# Altium PCB Educational electronics module.PcbDoc
Units mm, origin at the board's own origin, x right, y up, seen from the top; angles counter-clockwise.
Board outline 45 x 40 mm, 2 copper layers (Top Layer, Bottom Layer), stack 0.36 mm thick; 11 components, 10 nets, 39 pads, 0 vias.
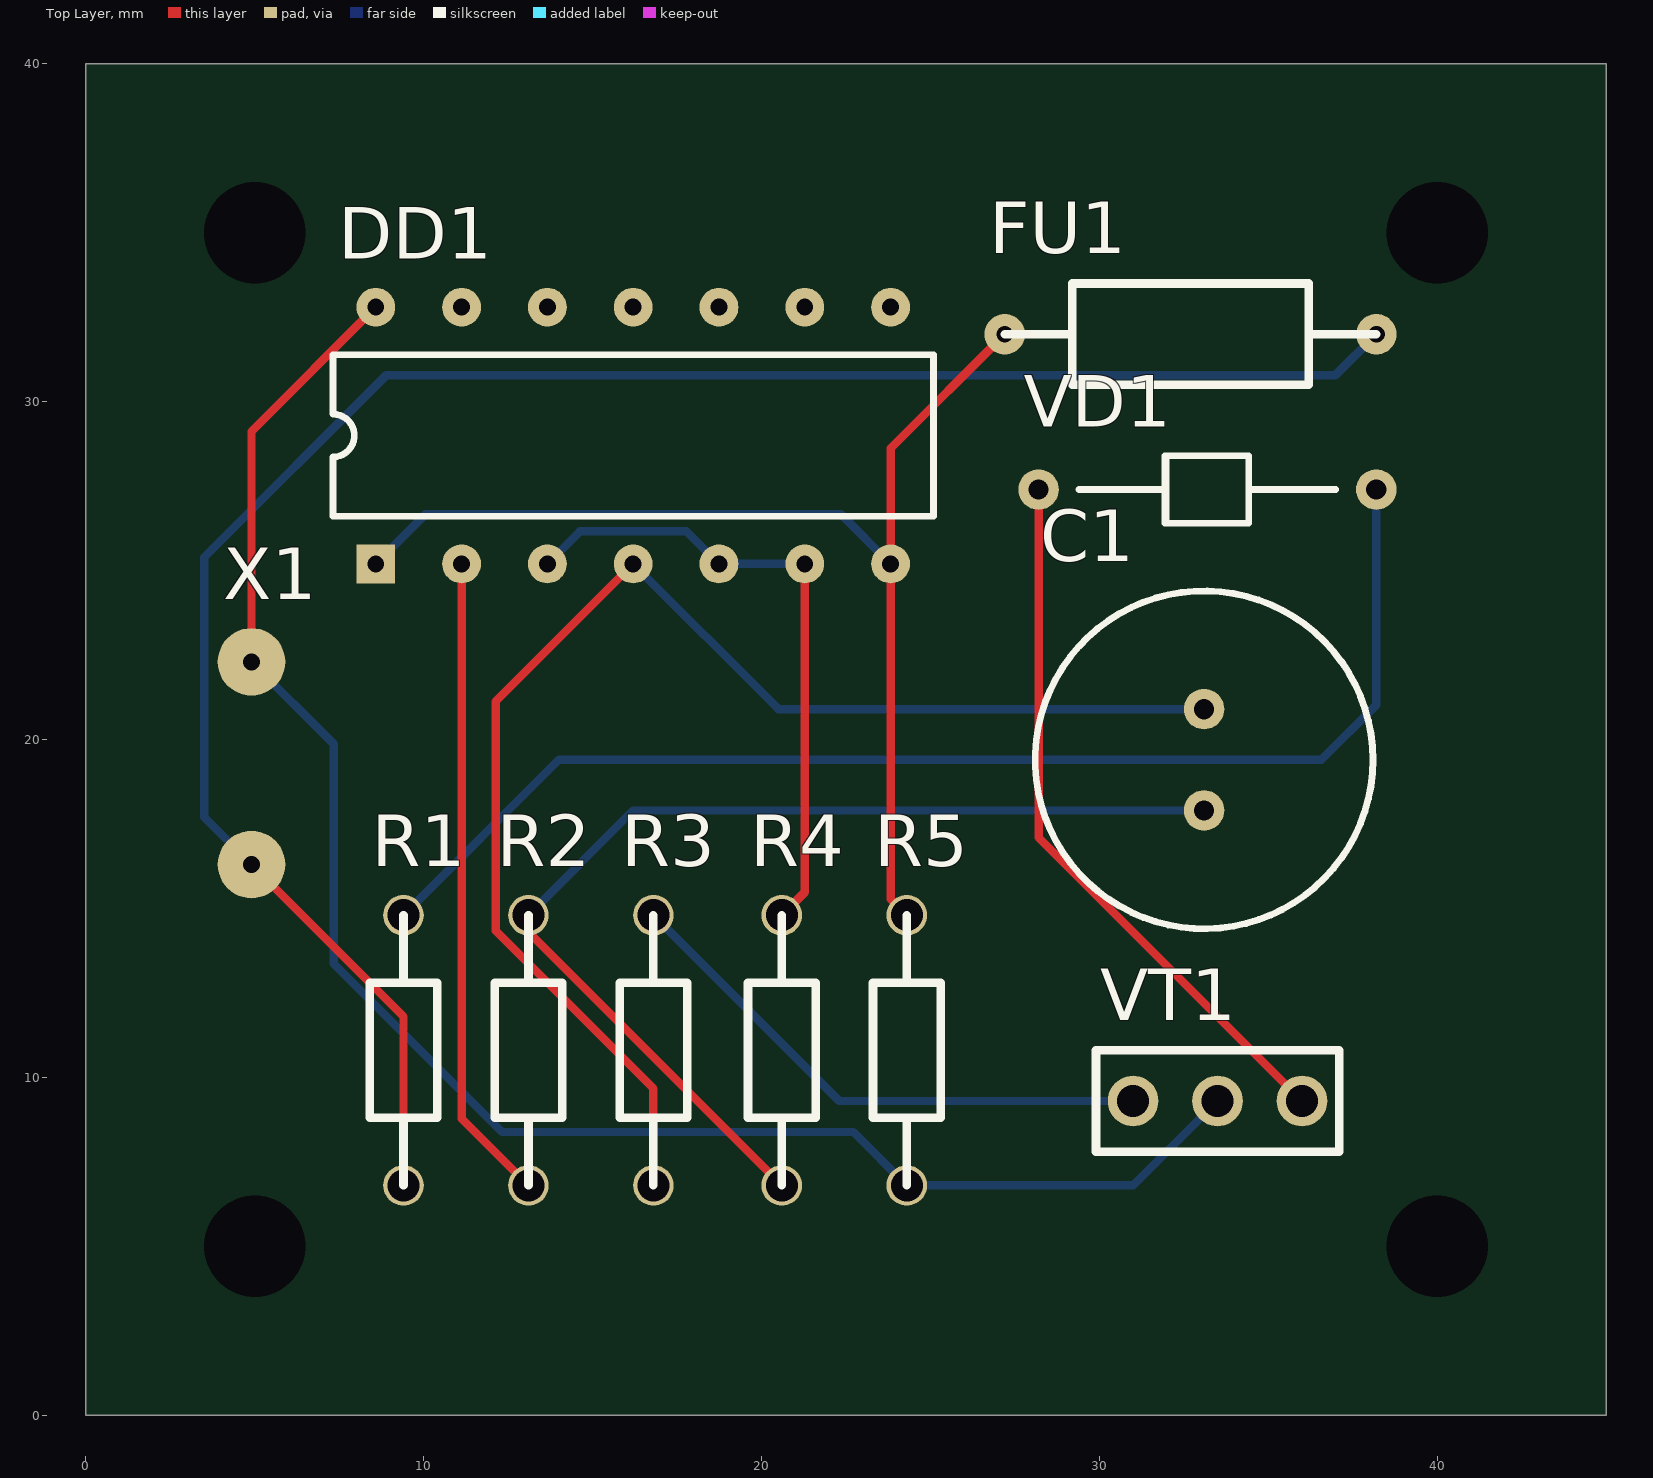
[diagram p0: Top Layer view]
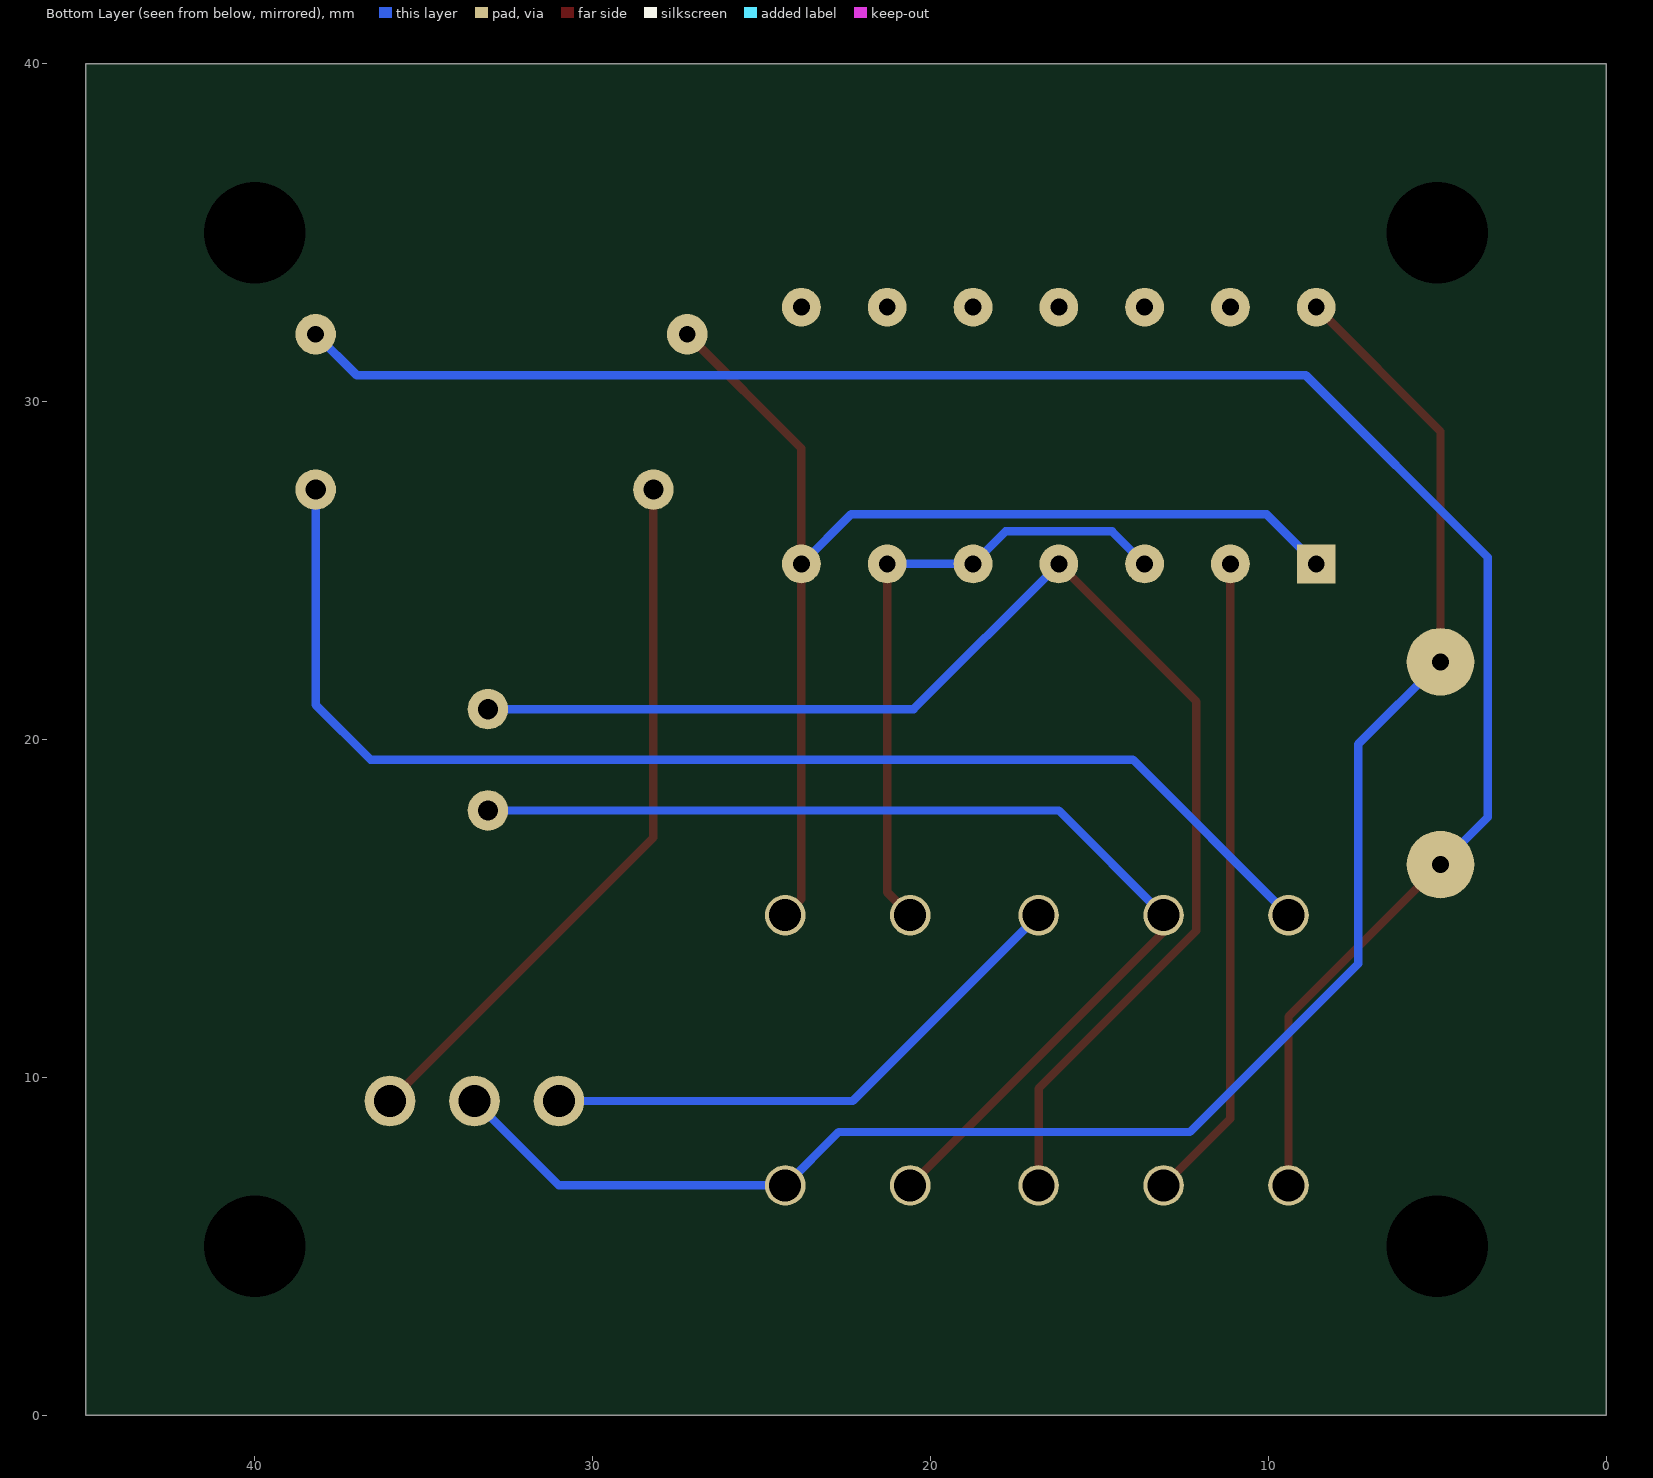
[diagram p1: Bottom Layer view, seen from below]

## Layer stack, top to bottom
Top Solder: solder mask 0.01, Solder Resist, Dk 3.5
Top Layer: signal copper 0.03
Dielectric 1: dielectric 0.3, FR-4, Dk 4.8
Bottom Layer: signal copper 0.03
Bottom Solder: solder mask 0.01, Solder Resist, Dk 3.5

## Board outline
0,0 45,0 45,40 0,40

## Design rules (kind name [scope] priority, off if disabled: settings)
Clearance [All] p1: gap=0.25 ignorepadtopadclearanceinfootprint=FALSE
PolygonConnect [All] p1: connectstyle=Relief reliefconductorwidth=0.254 reliefentries=4 polygonreliefangle="90 Angle" airgapwidth=0.254
RoutingVias [All] p1: holewidth=0.711 width=1.27 viastyle="Through Hole" minholewidth=0.711 minwidth=1.27 maxholewidth=0.711 maxwidth=1.27
SolderMaskExpansion [All] p1: expansion=0.102 istentingtop=FALSE
Width [All] p1: maxlimit=0.25 minlimit=0.25 preferedwidth=0.25
30 further rules are at their usual default settings.

## Components (designator, comment, footprint, x,y, rotation, side; value= is the part's Value field where it differs from the comment)
C1 "220 нФ" Конденсатор 33.1,17.9 r90 top (schematic designator С1)
DD1 "К561ЛЕ5" К561ЛЕ5 8.58,25.2 r90 top
FU1 "1 А" Запобіжник 38.2,32 r180 top
R1 "680 Ом" Резистор 9.4,6.8 r90 top
R2 "680 Ом" Резистор 13.1,6.8 r90 top
R3 "680 Ом" Резистор 16.8,6.8 r90 top
R4 "680 Ом" Резистор 20.6,6.8 r90 top
R5 "680 Ом" Резистор 24.3,6.8 r90 top
VD1 "1N4001" Діод 38.2,27.4 r180 top
VT1 "КТ315" Транзистор 37.1,7.8 r90 top
X1 "Коло." "Роз'єм двовх." 4.9,16.3 r90 top (schematic designator Конт.)

## Footprints (in the part's own frame and the unit in brackets; to place one, negate y for a bottom-side part, rotate by r counter-clockwise, add the part's x,y. Pads: shape width x height; smd on the part's side, far side on the other; paste and mask are expansions set on the pad)
Діод [mm]
  round 1.2 hole 0.6: 1(0,0) 2(10,0)
  silkscreen extent 1.2,-1 8.8,1, body extent -0.7,-1.1 10.7,1.1, height 3
Запобіжник [mm]
  round 1.2 hole 0.5: 1(0,0) 2(11,0)
  silkscreen extent 0,-1.5 11,1.5, body extent -0.7,-1.6 11.7,1.6, height 3
К561ЛЕ5 [mm]
  rect 1.15x1.15 hole 0.5: 1(0,0)
  round 1.15 hole 0.5: 2(0,-2.54) 3(0,-5.08) 4(0,-7.62) 5(0,-10.16) 6(0,-12.7) 7(0,-15.24) 8(7.6,-15.24) 9(7.6,-12.7) 10(7.6,-10.16) 11(7.6,-7.62) 12(7.6,-5.08) 13(7.6,-2.54) 14(7.6,0)
  silkscreen extent 1.41,-16.51 6.19,1.27, body extent -0.68,-16.61 8.28,1.37, height 0.13
Конденсатор [mm]
  round 1.2 hole 0.6: 1(0,0) 2(3,0)
  silkscreen extent -3.5,-5 6.5,5, body extent -3.6,-5.1 6.6,5.1, height 7
Резистор [mm]
  round 1.2 hole 0.95: 1(0,0) 2(8,0)
  silkscreen extent 0,-1 8,1, body extent -0.7,-1.2 8.7,1.2, height 2
"Роз'єм двовх." [mm]
  round 2 hole 0.5: 1(0,0) 2(6,0)
Транзистор [mm]
  round 1.5 hole 0.95: 1(1.5,1.1) 2(1.5,3.6) 3(1.5,6.1)
  silkscreen extent 0,0 3,7.2, body extent 0,0 3,7.2, height 5

## Part data
C1: library part Конденсатор
FU1: library part Запобіжник
R1 R2 R3 R4 R5: library part Резистор
VD1: library part Діод
VT1: library part Транзистор
X1: library part "Вхідний роз’єм двовход."

## Free pads (board coordinates)
  round 2 hole 3: 1(5,5) 2(5,35) 3(40,35) 4(40,5)

## Nets (pads, with @x,y where several pads share a name; then routed paths per layer and width w, separated by ;. In a path a pad name is that pad's centre, name@x,y a point inside that pad or via, vN(x,y) a via of type N, cw(c..) or ccw(c..) an arc to the next point about the centre after c; other vN are vias at no path point)
GND: DD1.14 R5.1 VT1.2 X1.2 | length 51.9
  Top Layer w0.25: X1.2 4.9,29.12 DD1.14
  Bottom Layer w0.25: X1.2 7.341,19.859 7.341,13.36 12.319,8.382 22.718,8.382 R5.1 31,6.8 VT1.2
NetDD1_1: DD1.1 DD1.7 FU1.2 R5.2 | length 35.3
  Top Layer w0.25: R5.2 23.82,15.28 DD1.7 23.82,28.62 FU1.2
  Bottom Layer w0.25: DD1.1 10.05,26.67 22.35,26.67 DD1.7
NetDD1_2: DD1.2 R2.1 | length 19.2
  Top Layer w0.25: DD1.2 11.12,8.78 R2.1
NetDD1_3: DD1.3 DD1.5 DD1.6 R4.2 | length 19.1
  Top Layer w0.25: R4.2 21.28,15.48 DD1.6
  Bottom Layer w0.25: DD1.3 14.622,26.162 17.778,26.162 DD1.5 DD1.6
NetDD1_4: C1.2 DD1.4 R3.1 | length 40.7
  Top Layer w0.25: DD1.4 12.125,21.125 12.125,14.342 16.8,9.667 R3.1
  Bottom Layer w0.25: DD1.4 20.5,20.9 C1.2
NetR1_2: R1.2 VD1.1 | length 37.8
  Bottom Layer w0.25: R1.2 14.006,19.406 36.576,19.406 38.2,21.03 VD1.1
NetR2_2: C1.1 R2.2 R4.1 | length 32.4
  Top Layer w0.25: R2.2 13.1,14.3 R4.1
  Bottom Layer w0.25: R2.2 16.2,17.9 C1.1
NetR3_2: R3.2 VT1.3 | length 16.5
  Bottom Layer w0.25: R3.2 22.3,9.3 VT1.3
NetVD1_2: VD1.2 VT1.1 | length 21.3
  Top Layer w0.25: VD1.2 28.2,17.1 VT1.1
VCC: FU1.1 R1.1 X1.1 | length 58.5
  Top Layer w0.25: X1.1 9.4,11.8 R1.1
  Bottom Layer w0.25: X1.1 3.505,17.695 3.505,25.4 8.89,30.785 36.985,30.785 FU1.1
pads on no net: DD1.8 DD1.9 DD1.10 DD1.11 DD1.12 DD1.13